# EAGLE board Uni-2.1,Complete (EAGLE 9.6.2)
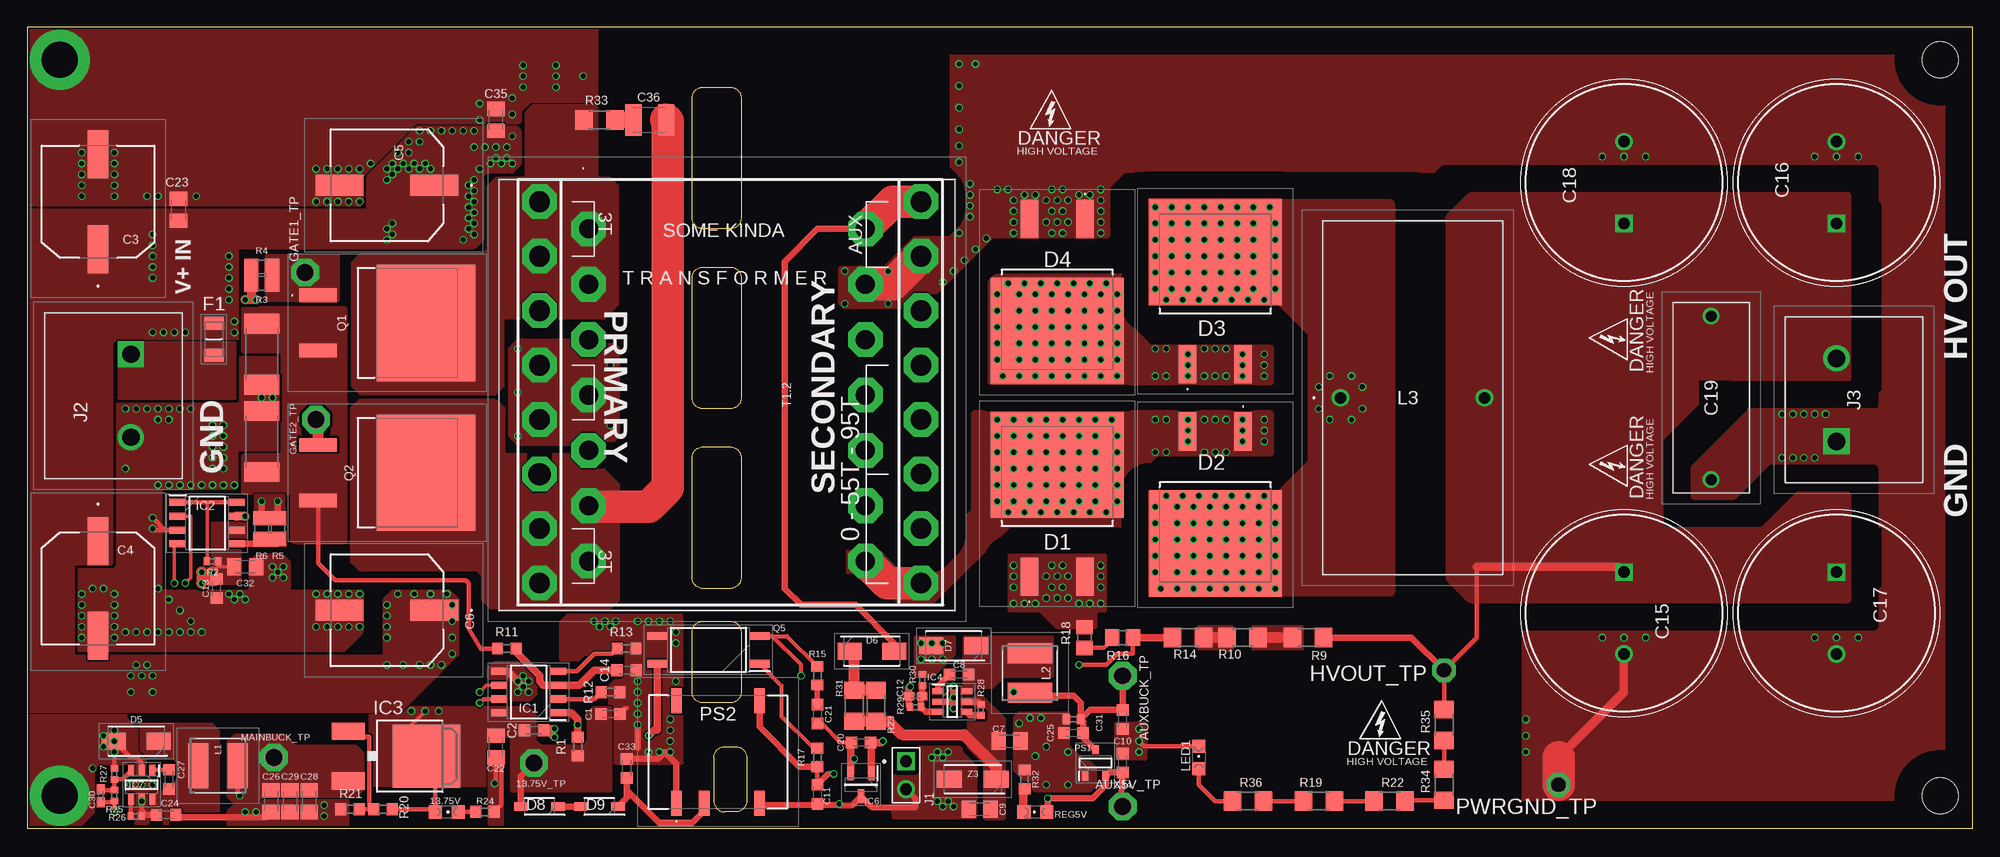
[diagram p0: board, top side]
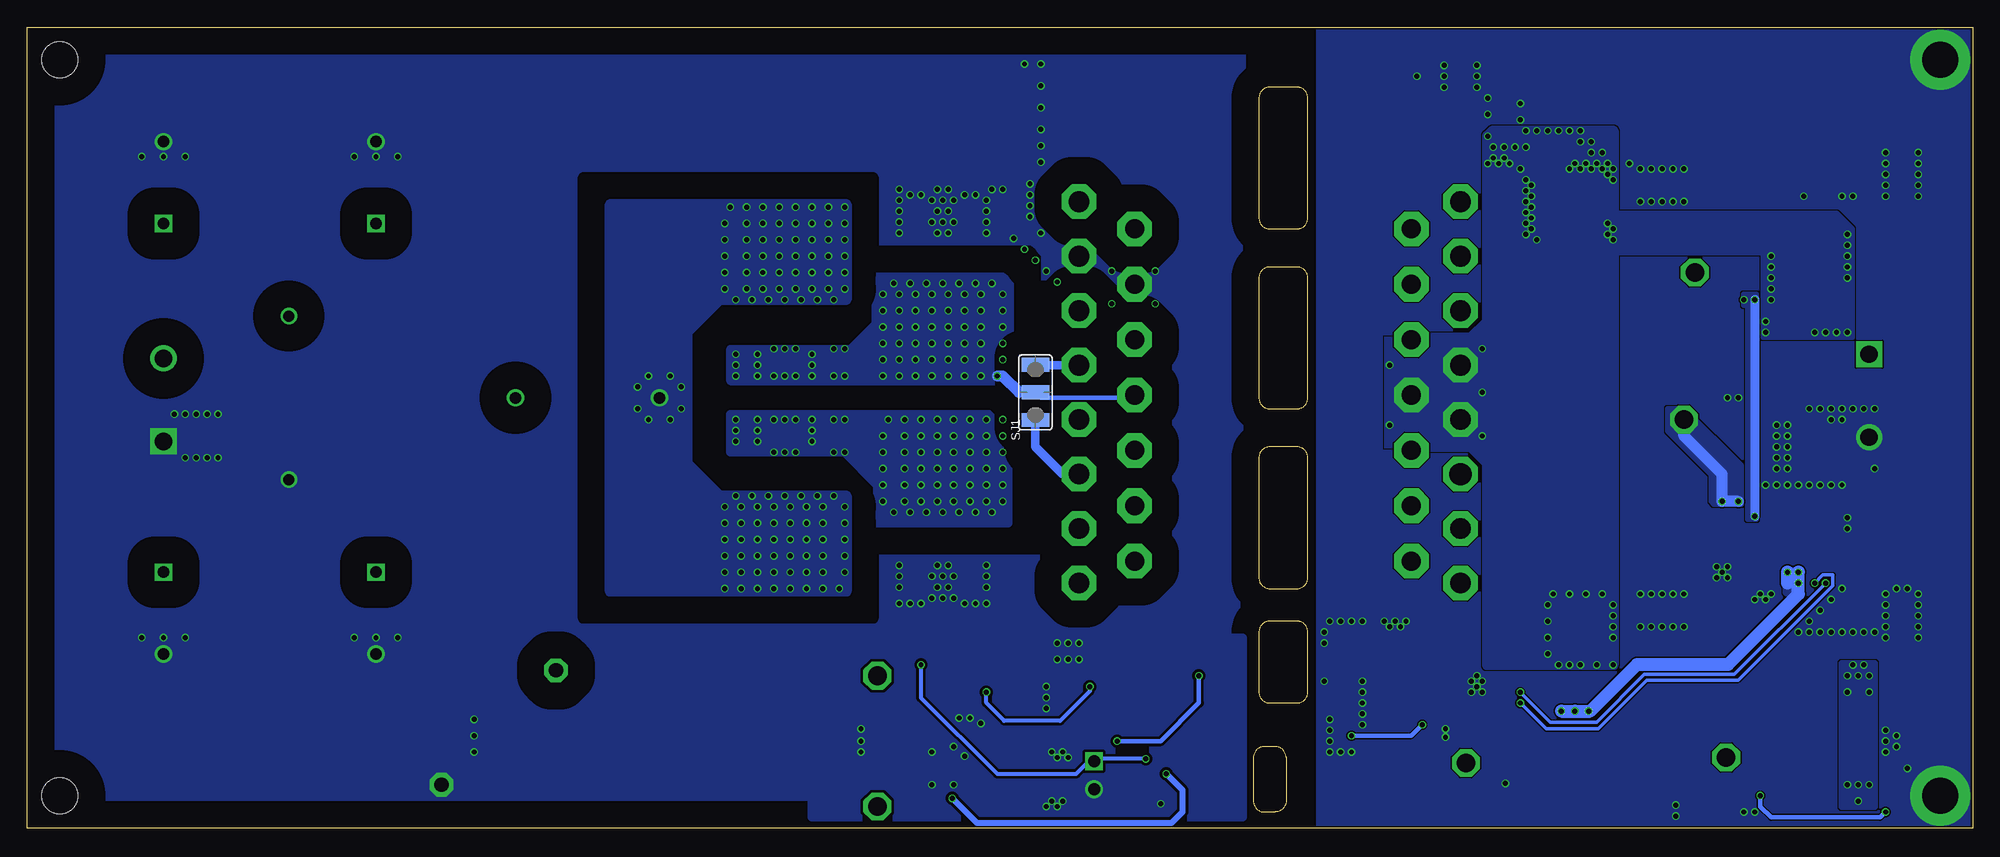
[diagram p1: board, bottom side, seen from below]

Size 178.5 x 73.5 mm. Coordinates in mm from the lower left corner, seen from the top.
Outline: 0,0 178.5,0 178.5,73.5 0,73.5 0,0
Outline: 64.5,11.5 62,11.5 arc-90 61,12.5 61,18 arc-90 62,19 64.5,19 arc-90 65.5,18 65.5,12.5 arc-90 64.5,11.5
Outline: 63,6.5 63,2.5 arc90 64,1.5 65,1.5 arc90 66,2.5 66,6.5 arc90 65,7.5 64,7.5 arc90 63,6.5
Outline: 64.5,22 62,22 arc-90 61,23 61,34 arc-90 62,35 64.5,35 arc-90 65.5,34 65.5,23 arc-90 64.5,22
Outline: 64.5,38.5 62,38.5 arc-90 61,39.5 61,50.5 arc-90 62,51.5 64.5,51.5 arc-90 65.5,50.5 65.5,39.5 arc-90 64.5,38.5
Outline: 64.5,55 62,55 arc-90 61,56 61,67 arc-90 62,68 64.5,68 arc-90 65.5,67 65.5,56 arc-90 64.5,55
Copper layers (1*16): Top 0.035559375mm / dielectric 1.6mm / Bottom 0.035559375mm
Design rules "jlcpcb2layer *": minimum track width 5mil, minimum drill 12mil, track to track 5mil, track to pad 5mil, pad to pad 5mil, via to via 5mil, smd to smd 5mil, copper to edge 8mil, drill to drill 6mil, minimum pad ring 5mil, minimum via ring 3mil, stop-mask expansion 2.5mil, vias tented up to drill 30mil, thermal gap 10mil
Holes 3.3 mm at 175.5,70.5 175.5,3

## Footprints (pad centres in the part's own frame; a part is rotated, then mirrored left to right if it is on the bottom)
CHIPLED_0805 = smd 1.2 x 1.2: A 0,-1.05; C 0,1.05
P1-17 = drill 1.702 pad 2.54 octagon: TP 0,0
C0603K = smd 1.05 x 1.08: 1 -0.875,0; 2 0.875,0
16SVF1000M = smd 1.9 x 4.4: 1 0,-4.35; 2 0,4.35
C0805K = smd 1.3 x 1.6: 1 -1,0; 2 1,0
C0402K = smd 0.925 x 0.74: 1 -0.6,0; 2 0.6,0
CAPPRD750W85D1800H2200 = drill 1.05 pad 1.575 square: 1 0,0 | drill 1.05 pad 1.575: 2 7.5,0
ECWFE2W105K = drill 1 pad 1.5: 1 0,0; 2 15,0
C0402 = smd 0.7 x 0.9: 1 -0.65,0; 2 0.65,0
C1210K = smd 1.5 x 2.9: 1 -1.5,0; 2 1.5,0
STB20N95K5 = smd 1.6 x 3.5: 1 -2.54,-6.907; 3 2.54,-6.907 | smd 12.2 x 9.75: 2 0,3.368
DIOM5127X229N = smd 2.2 x 1.55: 1 -2.05,0; 2 2.05,0
SOD3716X145N = smd 1.2 x 0.75: 1 -1.7,0; 2 1.7,0
1206SMTFUSE = smd 1.17 x 1.8: 1 -1.47,0; 2 1.47,0
P1-13 = drill 1.321 pad 2.159 octagon: TP 0,0
SOIC127P600X175-8N = smd 1.5 x 0.65: 1 -2.7,1.905; 2 -2.7,0.635; 3 -2.7,-0.635; 4 -2.7,-1.905; 5 2.7,-1.905; 6 2.7,-0.635; 7 2.7,0.635; 8 2.7,1.905
DPACK = smd 1.6 x 3: 1 -2.28,-4.8; 3 2.28,-4.8 | smd 5.8 x 6.2: 4 0,2.38
SOT95P280X100-6N = smd 1.05 x 0.55: 1 -1.3,0.95; 2 -1.3,0; 3 -1.3,-0.95; 4 1.3,-0.95; 5 1.3,0; 6 1.3,0.95
SOT95P237X112-3N = smd 1.3 x 0.6: 1 -1.05,0.95; 2 -1.05,-0.95; 3 1.05,0
61300211121 = drill 1.1 square: 1 -1.27,0 | drill 1.1: 2 1.27,0
TB00576202BE = drill 1.6 pad 2.4 square: 1 0,0 | drill 1.6 pad 2.4: 2 7.62,0
LQH5BPB100MT0L = smd 1.85 x 4.1: 1 -1.825,0; 2 1.825,0
2300LL102VRC = drill 1.06 pad 1.59: 1 0,0; 2 13.208,0
SOT95P240X120-3N = smd 0.85 x 0.6: 1 -1.2,0.95; 2 -1.2,-0.95; 3 1.2,0
NXE2S1205MCR13 = smd 1 x 2.3: 1 -3.81,-4.7; 3 -1.27,-4.7; 7 3.81,-4.7; 8 3.81,4.7; 14 -3.81,4.7
D2PAK = smd 1.257 x 3.429: 1 -2.54,-8.192; 3 2.54,-8.192 | smd 10.668 x 9.017: 2 0,1.715
SOP254P1015X230-4N = smd 1.85 x 0.7: 1 -4.7,1.27; 2 -4.7,-1.27; 3 4.7,-1.27; 4 4.7,1.27
R0603 = smd 1 x 1.1: 1 -0.85,0; 2 0.85,0
R0402 = smd 0.6 x 0.7: 1 -0.5,0; 2 0.5,0
R0805 = smd 1.3 x 1.5: 1 -0.95,0; 2 0.95,0
R2512 = smd 1.8 x 3.2: 1 -2.8,0; 2 2.8,0
R1206 = smd 1.6 x 1.803: 1 -1.422,0; 2 1.422,0
SJ_2W = smd 1.27 x 2.54: 1 -2.54,0; 2 0,0; 3 2.54,0
BIGTRANS! = drill 1.905 pad 3.175 octagon: 1 0,0; 2 0,5; 4 0,15; 5 0,20; 6 0,25; 7 0,30; 8 0,35; 9 35,0; 10 35,5; 11 35,10; 12 35,15; 13 35,20; 14 35,25; 15 35,30; 16 35,35 | drill 2.032 pad 3.175 octagon: 3 0,10
B66362B1014T001 = drill 1.75 pad 3.175 octagon: 1 0,0; 2 0,25.4; 3 5.08,0; 4 5.08,25.4; 5 10.16,0; 6 10.16,25.4; 7 15.24,0; 8 15.24,25.4; 9 20.32,0; 10 20.32,25.4; 11 25.4,0; 12 25.4,25.4; 13 30.48,0; 14 30.48,25.4
DIOM5226X220N = smd 2.3 x 1.55: 1 -2.15,0; 2 2.15,0

## Placement (x,y rotation side)
13.75V  GRN  [CHIPLED_0805]  38.5,1.5 270 top
13.75V_TP  TPSQPAD1-17  [P1-17]  46.5,6 90 top
AUX5V_TP  TPSQPAD1-17  [P1-17]  100.5,2 0 top
AUXBUCK_TP  TPSQPAD1-17  [P1-17]  100.5,14 270 top
C1  10 uF  [C0603K]  53.5,10.5 0 top
C2  0.1 uF  [C0603K]  46.5,9 0 top
C3  OVK151M1VTR-10131  [16SVF1000M]  6.5,57.5 0 top
C4  OVK151M1VTR-10131  [16SVF1000M]  6.5,22 180 top
C5  OVK151M1VTR-10131  [16SVF1000M]  33,59 90 top
C6  OVK151M1VTR-10131  [16SVF1000M]  33,20 90 top
C7  10 uF  [C0805K]  90.12,8 0 top
C8  0.1 uF  [C0603K]  85.5,14.12 0 top
C9  10 uF  [C0805K]  87.38,1.75 180 top
C10  10 uF  [C0603K]  100.5,10 90 top
C11  10 uF  [C0603K]  72.5,3.12 90 top
C12  100 pF  [C0402K]  81.5,12.12 0 top
C13  10 uF  [C0603K]  17.38,22 270 top
C14  470 pF  [C0603K]  55,14.5 0 top
C15  EEU-ED2V470S  [CAPPRD750W85D1800H2200]  146.5,23.5 270 top
C16  EEU-ED2V470S  [CAPPRD750W85D1800H2200]  166,55.5 90 top
C17  EEU-ED2V470S  [CAPPRD750W85D1800H2200]  166,23.5 270 top
C18  EEU-ED2V470S  [CAPPRD750W85D1800H2200]  146.5,55.5 90 top
C19  ECW-FE2W105K  [ECWFE2W105K]  154.5,32 90 top
C20  470pF  [C0603K]  76.5,7.88 0 top
C21  2.2nF  [C0603K]  72.5,10.5 90 top
C22  10 uF  [C0805K]  43,7.5 90 top
C23  10 uF  [C0805K]  13.88,56.75 270 top
C24  1 uF  [C0603K]  12.75,1.25 0 top
C25  10 uF  [C0603K]  96,8.75 0 top
C26  10 uF  [C0805K]  22.38,2.5 90 top
C27  0.1 uF  [C0603K]  13,4.5 90 top
C28  10 uF  [C0805K]  25.88,2.5 90 top
C29  10 uF  [C0805K]  24.12,2.5 90 top
C30  100 pF  [C0402K]  6.75,3 90 top
C31  10 uF  [C0402]  96,10 0 top
C32  10 uF  [C0805K]  20,24 180 top
C33  10 uF  [C0603K]  55,5.5 270 top
C34  10 uF  [C0603K]  100.5,6 270 top
C35  1 uF  [C0805K]  43,65 90 top
C36  [C1210K]  57.12,65 0 top
D1  FERD20H60CG-TR  [STB20N95K5]  94.5,30 0 top
D2  FERD20H60CG-TR  [STB20N95K5]  109,29.5 180 top
D3  FERD20H60CG-TR  [STB20N95K5]  109,49.5 0 top
D4  FERD20H60CG-TR  [STB20N95K5]  94.5,49 180 top
D5  SCHOTTKY  [DIOM5127X229N]  10,8 180 top
D6  US1M  [DIOM5127X229N]  77.5,16.25 0 top
D7  SCHOTTKY  [DIOM5127X229N]  85,16.75 180 top
D8  SM4007PL  [SOD3716X145N]  47,2 180 top
D9  SM4007PL  [SOD3716X145N]  52.5,2 180 top
F1  1206SMTFUSE  [1206SMTFUSE]  17.12,44.88 90 top
GATE1_TP  TPSQPAD1-17  [P1-17]  25.5,51 0 top
GATE2_TP  TPSQPAD1-17  [P1-17]  26.5,37.5 90 top
HVOUT_TP  TPSQPAD1-13  [P1-13]  130,14.5 270 top
IC1  UCC38083DR  [SOIC127P600X175-8N]  46,12.5 180 top
IC2  MCP14A0304T-E_SN  [SOIC127P600X175-8N]  16.5,28 0 top
IC3  LM317MBDT  [DPACK]  34.25,6.62 270 top
IC4  ME3116  [SOT95P280X100-6N]  84.88,11.62 0 top
IC6  TL431CL3T  [SOT95P237X112-3N]  76.5,4 270 top
IC7  ME3116  [SOT95P280X100-6N]  10.5,4 270 top
J1  61300211121  [61300211121]  80.62,4.88 270 top
J2  TB005-762-02BE  [TB00576202BE]  9.5,43.5 270 top
J3  TB005-762-02BE  [TB00576202BE]  166,35.5 90 top
L1  LQH5BPN6R8NT0L  [LQH5BPB100MT0L]  17.5,5.75 0 top
L2  LQH5BPN6R8NT0L  [LQH5BPB100MT0L]  92,14.25 90 top
L3  2300LL-102-V-RC  [2300LL102VRC]  120.5,39.5 0 top
LED1  RED  [CHIPLED_0805]  107.5,6.5 0 top
MAINBUCK_TP  TPSQPAD1-17  [P1-17]  22.62,6.5 180 top
PS1  AP2120N-5.0TRG1  [SOT95P240X120-3N]  98,6 90 top
PS2  NXE2S1205MC-R13  [NXE2S1205MCR13]  63.38,7 0 top
PWRGND_TP  TPSQPAD1-13  [P1-13]  140.5,4 180 top
Q1  STB130N6F7  [D2PAK]  34.88,46.38 270 top
Q2  STB130N6F7  [D2PAK]  34.88,32.62 270 top
Q5  VOL617A-4X001T  [SOP254P1015X230-4N]  62.5,16.38 180 top
R1  1k  [R0603]  50.5,7.5 90 top
R2  1k  [R0402]  17,24.5 0 top
R3  10  [R0805]  21.5,50 0 top
R4  10  [R0805]  21.5,51.5 0 top
R5  10  [R0805]  23,27.5 90 top
R6  10  [R0805]  21.5,27.5 90 top
R7  0.05  [R2512]  21.5,35.5 270 top
R8  0.05  [R2512]  21.5,43.5 90 top
R9  100k  [R1206]  117.5,17.5 180 top
R10  100k  [R1206]  111.5,17.5 180 top
R11  1k  [R0603]  44,16.5 180 top
R12  22k  [R0603]  53.5,12.5 0 top
R13  470k  [R0603]  55,16.5 0 top
R14  100k  [R1206]  106.5,17.5 180 top
R15  15k  [R0603]  72.5,14 270 top
R16  2.2k  [R0805]  100.5,17.5 0 top
R17  820  [R0603]  72.5,6.5 90 top
R18  330  [R0805]  97,17.5 270 top
R19  20k  [R1206]  118.5,2.5 0 top
R20  470  [R0603]  32.62,1.75 0 top
R21  4.7k  [R0603]  29.62,1.75 0 top
R22  20k  [R1206]  125,2.5 0 top
R23  100  [R1206]  77.88,11.25 270 top
R24  2k  [R0603]  42,1.5 180 top
R25  10k  [R0402]  8,3 270 top
R26  100k  [R0402]  10,1.12 180 top
R27  560  [R0402]  8,5 90 top
R28  100k  [R0402]  87.5,10.88 270 top
R29  10k  [R0402]  81.5,11.12 0 top
R30  10k  [R0402]  82.12,13.62 90 top
R31  100  [R1206]  75.88,11.25 270 top
R32  1k  [R0603]  91.5,4.5 270 top
R33  [R1206]  52.5,65 0 top
R34  20k  [R1206]  130,4 90 top
R35  20k  [R1206]  130,9.5 90 top
R36  20k  [R1206]  112,2.5 0 top
REG5V  RED  [CHIPLED_0805]  92.5,1.5 90 top
SJ1  [SJ_2W]  86,40 90 bottom
T1  BIGTRANS  [BIGTRANS!]  47,22.5 0 top
T1.2  B66362B1014T001  [B66362B1014T001]  51.5,55 270 top
U$1  HV  [PSFBC_ELECTRIC_SHOCK]  145,45.16 90 top
U$2  HV  [PSFBC_ELECTRIC_SHOCK]  145,33.55 90 top
U$3  HV  [PSFBC_ELECTRIC_SHOCK]  124.43,10 0 top
U$4  HV  [PSFBC_ELECTRIC_SHOCK]  94.16,66 0 top
Z3  1SMA4753A  [DIOM5226X220N]  86.75,4.5 180 top

## Library data of the parts
13.75V REG5V = led; LCSC_PART: C72043
13.75V_TP AUX5V_TP AUXBUCK_TP GATE1_TP GATE2_TP HVOUT_TP MAINBUCK_TP PWRGND_TP = testpad
C1 C2 C10 C13 C24 C25 C31 C33-C35 = rcl; LCSC_PART: C440198; SPICEPREFIX: C
C3-C6 Q1 Q2 T1 = SamacSys_Parts
C7 C9 C11 C20 C21 C36 = rcl; SPICEPREFIX: C
C8 C27 = rcl; LCSC_PART: C14663; SPICEPREFIX: C
C12 C30 = rcl; LCSC_PART: C1546; SPICEPREFIX: C
C14 = rcl; LCSC_PART: C1620; SPICEPREFIX: C
C15-C18 = SamacSys_Parts; DESCRIPTION: Aluminium Electrolytic Capacitor, Radial Lead; HEIGHT: 22mm; MANUFACTURER_NAME: Panasonic; MANUFACTURER_PART_NUMBER: EEU-ED2V470S; MOUSER_PART_NUMBER: 667-EEU-ED2V470S; MOUSER_PRICE-STOCK: https://www.mouser.co.uk/ProductDetail/Panasonic/EEU-ED2V470S?qs=MtOUKumLmnbbtLZIfgoN%2Fg%3D%3D
C19 = SamacSys_Parts; DESCRIPTION: Film Capacitors 450VDC 1.0uF 10% MPP L/S=15mm; HEIGHT: 13mm; MANUFACTURER_NAME: Panasonic; MANUFACTURER_PART_NUMBER: ECW-FE2W105K
C22 C23 C26 C28 C29 C32 = rcl; LCSC_PART: C440198
D1-D4 = SamacSys_Parts; DESCRIPTION: Rectifiers Field-Effect Rectifier Diode 60V; HEIGHT: 4mm; MANUFACTURER_NAME: STMicroelectronics; MANUFACTURER_PART_NUMBER: FERD20H60CG-TR; MOUSER_PART_NUMBER: 511-FERD20H60CG-TR; MOUSER_PRICE-STOCK: https://www.mouser.co.uk/ProductDetail/STMicroelectronics/FERD20H60CG-TR?qs=1mbolxNpo8ebHpKodyoUCQ%3D%3D
D5 D7 = SamacSys_Parts; DESCRIPTION: Schottky Diodes & Rectifiers 60V Sctky Bar Rectfr SMA (DO-214AC); HEIGHT: 2.29mm; LCSC_PART: C22452; MANUFACTURER_NAME: Vishay; MANUFACTURER_PART_NUMBER: SS16HE3_B/H; MOUSER_PART_NUMBER: 78-SS16HE3_B/H; MOUSER_PRICE-STOCK: https://www.mouser.co.uk/ProductDetail/Vishay-General-Semiconductor/SS16HE3_B-H?qs=MLItCLRbWsyJmaJ87KUvIw%3D%3D
D6 = SamacSys_Parts; DESCRIPTION: Schottky Diodes & Rectifiers 60V Sctky Bar Rectfr SMA (DO-214AC); HEIGHT: 2.29mm; MANUFACTURER_NAME: Vishay; MANUFACTURER_PART_NUMBER: SS16HE3_B/H; MOUSER_PART_NUMBER: 78-SS16HE3_B/H; MOUSER_PRICE-STOCK: https://www.mouser.co.uk/ProductDetail/Vishay-General-Semiconductor/SS16HE3_B-H?qs=MLItCLRbWsyJmaJ87KUvIw%3D%3D
D8 D9 = SamacSys_Parts; DESCRIPTION: Diode Switching 150mA 100V 400mW SOD123 Diodes Inc 1N4148W-7-F Switching Diode 100V, 2-Pin SOD-123; HEIGHT: 1.45mm; LCSC_PART: C64898; MANUFACTURER_NAME: Diodes Inc.; MANUFACTURER_PART_NUMBER: 1N4148W-7-F; MOUSER_PART_NUMBER: 621-1N4148W-F; MOUSER_PRICE-STOCK: https://www.mouser.co.uk/ProductDetail/Diodes-Incorporated/1N4148W-7-F?qs=LHX0FizJzg7Ae9ZM8LTAWw%3D%3D
F1 = SamacSys_Parts; DESCRIPTION: Surface Mount Fuses Surface Mt Chip fuse 1206 size, 40A; HEIGHT: 0.83mm; LCSC_PART: C136359; MANUFACTURER_NAME: Stewart Connector; MANUFACTURER_PART_NUMBER: 0685P9400-01; MOUSER_PART_NUMBER: 530-0685P9400-01; MOUSER_PRICE-STOCK: https://www.mouser.co.uk/ProductDetail/Bel-Fuse/0685P9400-01?qs=vLWxofP3U2w%252BWbEEn77VXg%3D%3D
IC1 = SamacSys_Parts; DESCRIPTION: Current Mode Push-Pull PWM With Programmable Slope Compensation; HEIGHT: 1.75mm; MANUFACTURER_NAME: Texas Instruments; MANUFACTURER_PART_NUMBER: UCC38083DR; MOUSER_PART_NUMBER: 595-UCC38083DR; MOUSER_PRICE-STOCK: https://www.mouser.co.uk/ProductDetail/Texas-Instruments/UCC38083DR/?qs=zqbRmZ%252BfZD9Rvt3ie7yhvg%3D%3D
IC2 = SamacSys_Parts; DESCRIPTION: Microchip Technology MCP14A0304T-E/SN Dual Low Side MOSFET Power Driver, 3A 8-Pin, SOIC; HEIGHT: 1.75mm; MANUFACTURER_NAME: Microchip; MANUFACTURER_PART_NUMBER: MCP14A0304T-E/SN; MOUSER_PART_NUMBER: 579-MCP14A0304T-E/SN; MOUSER_PRICE-STOCK: https://www.mouser.co.uk/ProductDetail/Microchip-Technology/MCP14A0304T-E-SN?qs=w%2Fv1CP2dgqqqWUCaoFqV0w%3D%3D
IC3 = v-reg
IC4 IC7 = SamacSys_Parts; LCSC_PART: C97643
IC6 = SamacSys_Parts; DESCRIPTION: Adjustable micropower shunt voltage reference; HEIGHT: 1.12mm; MANUFACTURER_NAME: STMicroelectronics; MANUFACTURER_PART_NUMBER: TL431CL3T; MOUSER_PART_NUMBER: 511-TL431CL3T; MOUSER_PRICE-STOCK: https://www.mouser.co.uk/ProductDetail/STMicroelectronics/TL431CL3T?qs=L6eUzyzWLAsU2SYO1NdhdA%3D%3D
J1 = Headers; CREATED_BY: PCBLayout.com; DIGI_KEY_PART_NUMBER: 732-5315-ND; MANUFACTURER: Wurth Electronics Inc.; MPN: 61300211121
J2 J3 = SamacSys_Parts; DESCRIPTION: Fixed Terminal Blocks screw type, 7.62 , horizontal, 2 poles, CUI Blue, slotted screw, PCB mount; HEIGHT: 21.7mm; MANUFACTURER_NAME: CUI Inc.; MANUFACTURER_PART_NUMBER: TB005-762-02BE; MOUSER_PART_NUMBER: 490-TB005-762-02BE; MOUSER_PRICE-STOCK: https://www.mouser.co.uk/ProductDetail/CUI-Devices/TB005-762-02BE?qs=vLWxofP3U2zXv1H2wuShow%3D%3D
L1 L2 = SamacSys_Parts; DESCRIPTION: MURATA - LQH5BPN6R8NT0L - INDUCTOR, 6.8UH, +/-30%, POWER; HEIGHT: 2.2mm; MANUFACTURER_NAME: Murata Electronics; MANUFACTURER_PART_NUMBER: LQH5BPN6R8NT0L; MOUSER_PART_NUMBER: 81-LQH5BPN6R8NT0L0L; MOUSER_PRICE-STOCK: https://www.mouser.co.uk/ProductDetail/Murata-Electronics/LQH5BPN6R8NT0L?qs=3ZwS9AhGA%2F4N8axqd87eRQ%3D%3D
L3 = SamacSys_Parts; DESCRIPTION: Inductor High Current Toroid 1000uH/378.9uH 15% 1KHz 3.5A 137mOhm DCR RDL; HEIGHT: 32.512mm; MANUFACTURER_NAME: Bourns; MANUFACTURER_PART_NUMBER: 2300LL-102-V-RC; MOUSER_PART_NUMBER: 652-2300LL-102-V-RC; MOUSER_PRICE-STOCK: https://www.mouser.co.uk/ProductDetail/Bourns/2300LL-102-V-RC?qs=d7g9p1yFhWZHzfawXthNnQ%3D%3D
LED1 = led
PS1 = SamacSys_Parts; DESCRIPTION: IC REG LINEAR 5V 150MA SOT23; HEIGHT: 1.2mm; MANUFACTURER_NAME: Diodes Inc.; MANUFACTURER_PART_NUMBER: AP2120N-5.0TRG1; MOUSER_PART_NUMBER: 621-AP2120N-5.0TRG1; MOUSER_PRICE-STOCK: https://www.mouser.co.uk/ProductDetail/Diodes-Incorporated/AP2120N-50TRG1?qs=M%2FOdCRO8QQ3JQu49DdtyIA%3D%3D
PS2 = SamacSys_Parts; DESCRIPTION: Isolated DC/DC Converters DC/DC SM 2W 12-5V Single 3kV; HEIGHT: 4.81mm; MANUFACTURER_NAME: Murata Electronics; MANUFACTURER_PART_NUMBER: NXE2S1205MC-R13; MOUSER_PART_NUMBER: 580-NXE2S1205MC-R13; MOUSER_PRICE-STOCK: https://www.mouser.co.uk/ProductDetail/Murata-Power-Solutions/NXE2S1205MC-R13?qs=UqPySVGgRwFuSegQbHt7Hw%3D%3D
Q5 = SamacSys_Parts; DESCRIPTION: Vishay VOL617A-4X001T DC Input Phototransistor Output Optocoupler, Surface Mount, 4-Pin LSOP; HEIGHT: 2.3mm; MANUFACTURER_NAME: Vishay; MANUFACTURER_PART_NUMBER: VOL617A-4X001T; MOUSER_PART_NUMBER: 78-VOL617A-4X001T; MOUSER_PRICE-STOCK: https://www.mouser.co.uk/ProductDetail/Vishay-Semiconductors/VOL617A-4X001T?qs=s4XK1XdnRilEoTFGQUoymA%3D%3D
R1 R20 R21 R24 R32 = rcl; LCSC_PART: C22975; SPICEPREFIX: R
R2-R10 R14-R19 R22 R23 R31 R33-R36 = rcl; SPICEPREFIX: R
R11 = rcl; LCSC_PART: C21190; SPICEPREFIX: R
R12 = rcl; LCSC_PART: C31850; SPICEPREFIX: R
R13 = rcl; LCSC_PART: C25811; SPICEPREFIX: R
R25 R29 R30 = rcl; LCSC_PART: C25779; SPICEPREFIX: R
R26 R28 = rcl; LCSC_PART: C25741; SPICEPREFIX: R
R27 = rcl; LCSC_PART: C4177; SPICEPREFIX: R
SJ1 = jumper
T1.2 = SamacSys_Parts; DESCRIPTION: Ferrite Accessories, E Cores Accessories(EFD/ER/ETD), Coil former (ETD 34/17/11); HEIGHT: 33.1mm; MANUFACTURER_NAME: TDK; MANUFACTURER_PART_NUMBER: B66362B1014T001; MOUSER_PART_NUMBER: 871-B66362B1014T001; MOUSER_PRICE-STOCK: https://www.mouser.co.uk/ProductDetail/EPCOS-TDK/B66362B1014T001?qs=w5o0Loj0u7M9FVK%2Ff7P38g%3D%3D
U$1-U$4 = RMP - HALF BRIDGE 0.0.1
Z3 = SamacSys_Parts; DESCRIPTION: ON Semiconductor 1SMA5942BT3G Zener Diode, 51V 5% 1.5 W SMT 2-Pin SMA; HEIGHT: 2.2mm; LCSC_PART: C362284; MANUFACTURER_NAME: onsemi; MANUFACTURER_PART_NUMBER: 1SMA5942BT3G; MOUSER_PART_NUMBER: 863-1SMA5942BT3G; MOUSER_PRICE-STOCK: https://www.mouser.co.uk/ProductDetail/ON-Semiconductor/1SMA5942BT3G?qs=y2kkmE52mdPrQGqg%252Bfz9yg%3D%3D

## Nets
28VFUSE: C3.1 C4.1 C5.1 C6.1 C23.2 C24.1 C35.1 F1.2 IC7.5 R26.1 T1.2.7 T1.4 T1.5
AUX1: D6.2 T1.2.2 T1.16
AUXB: AUXBUCK_TP.TP C10.2 C12.1 C25.2 C31.2 L2.1 PS1.3 R29.1
AUXD: C7.1 C9.1 IC4.5 R23.2 R28.1 R31.2 Z3.1
BRIDGEGND: Q1.3 Q2.3 R7.2 R8.2 R11.2
BS1: C27.2 IC7.1
BS2: C8.1 IC4.1
CS-IN: C14.1 IC1.3 R11.1
DC+: C15.1 C16.1 C17.1 C18.1 C19.2 HVOUT_TP.TP J3.2 L3.2 R9.1 R35.2
DRAIN1: Q1.2 R33.1 T1.2.1 T1.2.3 T1.7 T1.8
DRAIN2: C36.2 Q2.2 T1.1 T1.2 T1.2.11 T1.2.13
EN1: IC7.4 R26.2
EN2: IC4.4 R28.2
FB1: C30.2 IC7.3 R25.1 R27.1
FB2: C12.2 IC4.3 R29.2 R30.1
GNDA: C1.2 C2.2 C3.2 C4.2 C5.2 C6.2 C13.2 C14.2 C22.1 C23.1 C24.2 C26.1 C28.1 C29.1 C32.1 C33.1 C35.2 D5.2 IC1.5 IC2.3 IC7.2 J2.2 PS2.1 Q5.3 R7.1 R8.1 R12.2 R13.2 R21.1 R24.1 R27.2
N$1: R9.2 R10.1
N$2: IC1.7 IC2.2
N$3: C20.1 C21.1 IC6.2 J1.1 R14.2 R16.2
N$4: D8.1 D9.2
N$5: IC1.6 IC2.4
N$6: IC2.1 IC2.8 R2.1
N$7: IC2.7 R3.1 R4.1
N$8: IC2.5 R5.1 R6.1
N$9: SJ1.1 T1.11
N$10: IC3.1 R20.1 R21.2
N$11: C33.2 D9.1 PS2.3
N$12: LED1.A R36.1
N$13: IC1.2 R12.1
N$14: R19.1 R36.2
N$15: R10.2 R14.1
N$16: R16.1 R18.2
N$17: R19.2 R22.1
N$18: C20.2 IC6.1 Q5.2 R15.1
N$19: Q5.1 R17.2
N$20: F1.1 J2.1
N$21: C21.2 R15.2
N$22: 13.75V.C R24.2
N$24: R22.2 R34.1
N$25: SJ1.3 T1.13
N$26: R32.2 REG5V.C
N$27: D6.1 R23.1 R31.1
N$28: R34.2 R35.1
N$29: C36.1 R33.2
OPTO-EMITT: IC1.1 Q5.4 R1.2
PRE: C26.2 C28.2 C29.2 C30.1 IC3.3 L1.2 MAINBUCK_TP.TP R25.2
PWRGND: C7.2 C9.2 C10.1 C11.1 C15.2 C16.2 C17.2 C18.2 C19.1 C25.1 C31.1 C34.1 D1.1 D1.3 D4.1 D4.3 D7.2 IC4.2 IC6.3 J1.2 J3.1 LED1.C PS1.1 PS2.7 PWRGND_TP.TP R18.1 R30.2 R32.1 T1.2.4 T1.15 Z3.2
Q1G: GATE1_TP.TP Q1.1 R3.2 R4.2
Q2G: GATE2_TP.TP Q2.1 R5.2 R6.2
RECT: D2.2 D3.2 L3.1
REG: 13.75V.A 13.75V_TP.TP C1.1 C2.1 C13.1 C22.2 C32.2 D8.2 IC1.8 IC2.6 IC3.4 R1.1 R2.2 R20.2
REG5V: AUX5V_TP.TP C11.2 C34.2 PS1.2 PS2.8 R17.1 REG5V.A
RT: IC1.4 R13.1
SWITCH1: C27.1 D5.1 IC7.6 L1.1
SWITCH2: C8.2 D7.1 IC4.6 L2.2
TRANS1: D3.1 D3.3 D4.2 SJ1.2 T1.2.8
TRANS2: D1.2 D2.1 D2.3 T1.2.14 T1.9

## Tracks (layer width: path | path; a pad name or v marks a point on that pad's centre or on a via)
28VFUSE  (via drill 0.45)
  Top 0.406: IC7.5 10.5,1.5 R26.1
  Top 0.6: C24.1 10.75,1.25 10.5,1.5
  other vias: 33.5,61 34.5,61 35.5,61 36.5,61 41,62.5 35,63 42.5,61 43.5,61 34,60.5 35,60.5 36,60.5 37,60.5 36,64 37,64 38,64 39,64 41,57.5 41,58.5 43,61.5 44,61.5 36,63 44.5,63.5 40,64 41,54.5 44.5,61 41,56.5 41,55.5 41,59.5 41.5,60.5 34,62 35,62 33,59.5 33.5,60 33,60.5 10.5,4 9.5,4 11.5,4 9.5,12.5 11.5,14 11.5,12.5 9.5,14 10,15 44,62.5 43,62.5 42,62.5 39,16 38,15 39,17.5 39,19 39,20.5 33,15 33,20.5 33,19.5 33,18.5 33,17.5 37,15 36,15 34.5,15 34,21.5 35.5,21.5 37,21.5 38.5,21.5 41,64 33,54 33,55 40,54 40.5,55 40.5,57 40.5,59 40.5,58 40.5,56 33.5,54.5 33.5,55.5 19,45.5 19,46.5 14.5,45.5 13.5,45.5 12.5,45.5 11.5,45.5 18.5,48.5 18.5,49.5 18.5,50.5 18.5,51.5 18.5,52.5 45,40 53.5,42.5 53.5,37 45,44 45,36 11,15 10.5,14 10.5,2.5 11.5,54.5 11.5,53.5 11.5,52.5 11.5,51.5 11.5,50.5
  pour Top (rank 3, no thermals): 19,45 7.5,45 7.5,24.5 -3.5,24.5 -3.5,40 -4,40 -4,56.5 31.5,56.5 31.5,59.5 41.5,59.5 41.5,54.13 40.87,53.5 19,53.5
  pour Top (rank 6, no thermals): 42,60.5 44.37,60.5 45,61.13 45,63.87 44.37,64.5 36,64.5 31.5,60 31.5,59.5 41,59.5
  pour Top (rank 3, no thermals): 54,36.13 54,43.87 53.37,44.5 45.13,44.5 44.5,43.87 44.5,36.13 45.13,35.5 53.37,35.5
  pour Bottom (no thermals): 53.5,45 46,45 44.5,46.5 44.5,63.5 44,64 33,64 33,15 44.5,15 44.5,33.5 46,35 53.5,35
  pour Top (rank 2, no thermals): -2,11 34.12,11 39.25,16.13 39.25,20.86 38.62,21.5 33.63,21.5 33,20.86 33,15.5 4,15.5 4,27 -2,27
  pour Top (no thermals): 11.75,4.38 9.38,4.38 9.38,3.12 10,2.5 10,0.5 11,0.5 11,3 11.75,3.75
  pour Bottom (no thermals): 12,15.12 9,15.12 9,2 12,2
  pour Bottom (no thermals): 35.12,56.5 12.5,56.5 11,55 11,45 19.25,45 19.25,52.75 35.12,52.75
AUX1
  Top 0.6: D6.2 79.55,16.95 76,20.5 71,20.5 69.5,22 69.5,52 72.5,55 T1.2.2
  Top 3: T1.2.2 79.4,57.5 T1.16
AUXB  (via drill 0.45)
  Top 0.4: 96.88,8.32 C25.2 | 96.88,9.78 C31.2
  Top 0.55: L2.1 93.08,12.43 93.35,12.15
  Top 0.6: C12.1 80.9,11.22 R29.1 | 93.35,12.15 96,12.15 96.65,11.5 C31.2 97.53,10.88 C10.2 AUXBUCK_TP.TP | PS1.3 96.88,8.32 | C25.2 96.88,9.78
  Top 0.7: C12.1 80.9,12.9 v81,13 | L2.1 90.58,12.43 v90.5,12.5
  Bottom 0.35: v81,13 81,12.6 83.73,9.86 88.86,9.86 90.5,11.5 v90.5,12.5
AUXD
  Top 0.6: R28.1 87.25,11.62 IC4.5
  Top 1: R31.2 R23.2 79.01,9.83 80.24,8.6 85.94,8.6 88.9,5.64 Z3.1
  pour Top (isolate 0.254, rank 3, no thermals): 88,6 88,1 89.5,1 89.5,10 87.5,12 86,12 86,10 86.5,9.5 86.5,7.5
BRIDGEGND
  Top 0.406: R11.2 41.6,16.5 40.5,18.33 40.5,22.5 40.25,22.75 28.25,22.75 26.68,24.32 Q2.3
  pour Top (rank 6, no thermals): 29,34 20,34 20,31 24.5,31 24.5,26.5 29,26.5
  pour Top (isolate 0.254, rank 3, no thermals): 29,47.5 20,47.5 20,44 23.62,44 23.62,33 29,33
BS1
  Top 0.406: IC7.1 11.53,5.38 C27.2
BS2
  Top 0.6: IC4.1 83.58,13.07 C8.1
CS-IN
  Top 0.7: R11.1 44.85,16.15 47,14 47,13.5 47.37,13.13 IC1.3 50.63,13.13 52,14.5 C14.1
DC+
  Top 0.406: 133,24 133,17.5 HVOUT_TP.TP R35.2
  Top 0.6: 130.58,15.08 HVOUT_TP.TP 127,17.5 R9.1
  Top 0.8: 133,24 146,24 C15.1
  pour Top (isolate 2.5, rank 2, no thermals): 167,58 132.5,58 130.5,56 130.5,23 132.5,21 167,21 167,30.5 153,30.5 153,41.5 167,41.5
  pour Top (isolate 2.5, rank 2, no thermals): 156.5,41 167.12,41 167.12,44 156.5,44
DRAIN1
  pour Top (rank 6, no thermals): 53.37,59.5 43.13,59.5 42.5,58.87 42.5,53.13 41.87,52.5 30.64,52.5 30,51.87 30,40.63 30.64,40 42.87,40 43.5,40.63 43.5,46.87 43.63,47 52.87,47 54,48.13 54,58.87
  pour Top (rank 3, no thermals): 52,66 46.5,66 46,65.5 46,56 52,56
DRAIN2
  Top 1.016: 51.6,29.5 T1.2.11
  Top 3: C36.2 58.75,64.88 58.75,31.25 57,29.5 51.6,29.5
  pour Top (rank 3, no thermals): 42.87,39 30.64,39 30,38.37 30,24.64 30.64,24 41.37,24 42,23.36 42,21.14 42.63,20.5 53.37,20.5 54,21.14 54,31.36 51.37,34 43.5,34 43.5,38.37
EN1
  Top 0.406: R26.2 9.5,2.65 IC7.4
EN2
  Top 0.6: IC4.4 86.47,10.38 R28.2
FB1
  Top 0.406: C30.2 6.85,3.5 R25.1 R27.1 8.75,4.5 IC7.3
FB2
  Top 0.6: IC4.3 82.45,10.68 R29.2 82,12.03 C12.2 82.12,12.15 R30.1
GNDA  (via drill 0.45, 3.3 pad 5.5)
  Top 0.4: IC7.2 10.5,6 10,6.5 9.45,6.5 D5.2 | R27.2 v8,7
  Top 0.406: v11.5,27.5 11.63,27.36 IC2.3 12.63,27.36 v11.5,28.5 | R24.1 43.5,2.15 43.5,6 C22.1 43,4.25 v42.88,4.12 | 47.5,9.12 C2.2 47.75,9 | 55,11 54.88,11 C1.2
  Top 0.6: C24.2 13.87,1 21.88,1 C26.1 | 56,7.38 v56,9.5 | PS2.1 59.56,5.94 58.5,7 57.88,6.38 C33.1
  Top 0.7: IC1.5 44.09,14.4 v45,13.5 v45.5,13 | 47.5,9.12 v48.38,9.12 | 47.75,9 v48.38,8.38
  other vias: 11,38.5 12,38.5 14,38.5 15,38.5 12,37.5 10,38.5 9,33 13,38.5 9,38.5 13,37.5 18,37 18,36 18,35 18,34 18,33 17,37 17,36 17,35 17,34 17,33 5,20.5 5,17.5 5,18.5 8,20.5 8,18.5 8,17.5 6,22 8,21.5 21,1.5 20,1.5 27.25,1.12 27.25,2.12 30.5,18.5 29.5,18.5 28.5,18.5 27.5,18.5 26.5,18.5 26.5,21.5 27.5,21.5 28.5,21.5 29.5,21.5 30.5,21.5 56,11.5 56,10.5 59.5,17 59,19 58,19 57,19 56,19 53.5,18.5 52.5,18.5 53,19 52,19 54,19 30.5,60.5 29.5,60.5 28.5,60.5 27.5,60.5 26.5,60.5 26.5,57.5 27.5,57.5 28.5,57.5 29.5,57.5 30.5,57.5 45.5,68 45.5,69 45.5,70 48.5,70 48.5,69 48.5,68 5,58 5,59 5,60 5,62 8,62 8,61 8,60 8,59 8,58 5,61 8,19.5 7,22 5,19.5 5,21.5 3,3 3,70.5 6,5.5 23.5,24 22.5,24 23,23.5 22.5,23 23.5,23 18.5,21.5 19.5,21.5 19,21 20,21 13,21 12,22 16,18 14,20 15,19 12,31.5 13,31.5 18,31.5 14,31.5 15,31.5 16,31.5 17,31.5 19,31.5 15,18 14,18 13,18 12,18 11,18 10,18 9,18 22.5,39.5 21.5,39.5 12,58 11,58 15.5,58 51,69 41.5,65 44.5,65.5 41.5,66.5 44.5,67 31.5,61 59.5,18 59.5,13.5 59,8 59,10 59,9 56,12.5 56,13.5 59,7 58,7 57,7 46,13.5 45,12.5 46,12.5 45.5,14 8,8 8,9 7,8.5 7,7.5
  pour Bottom (rank 6, no thermals): 60.12,80 60.12,-3 -20,-3 -20,80
  pour Top (isolate 0.254, rank 6, no thermals): 19.5,39 8.5,39 8.5,25 5,25 5,15.5 27.86,15.5 30.5,18.13 30.5,21.5 12,21.5 12,31.5 19,31.5 19,35 22.75,35 22.75,43 19.5,43
  pour Top (rank 6, no thermals): 30.5,73.5 -3.5,73.5 -3.5,57.5 30.5,57.5
  pour Top (rank 6, no thermals): 23.36,25 21.14,25 20.5,24.36 20.5,21.14 24,21.14 24,24.36
  pour Top (rank 3, no thermals): 28.5,58 35.5,65 45,65 45,66 46,67 52,67 52,73.5 28.5,73.5
  pour Top (rank 6, no thermals): 59.87,9.5 59.87,19.5 49.63,19.5 49,18.87 49,15.5 50.5,15.5 51,16 53,16 54,17 55,17 55,14 54.5,13.5 54,13.5 53.5,13 53.5,11.5 54,11 54,10 54.5,9.5
  pour Top (rank 6, no thermals): 9,11 -3.5,11 -3.5,4 0.5,0 4.5,0 6,1.5 6,5.5 7,6.5 8,6.5 9,7.5
  pour Top (no thermals): 7,6 9.5,6 10,5.5 10,5 10.75,5 10.75,6.25 10,7 10,9 9,10 7.5,10 6.5,9 6.5,6.5
  pour Top (rank 6, no thermals): 28,3 27.5,2.5 21.5,2.5 21,2 19,2 18.5,1.5 18.5,0 29.38,0 29.38,3
  pour Top (rank 6, no thermals): 59.99,6 59.99,19.5 49.63,19.5 49,18.87 49,15.5 50.5,15.5 51,16 53,16 54,17 55,17 55,14 54.5,13.5 54,13.5 53.5,13 53.5,11.5 54,11 54,6
  pour Top (no thermals): 46,15 43,15 42.5,14.5 42.5,14 44,14 44.5,13.5 44.5,12 46,12 46.5,12.5 46.5,13.5 46.5,14.5
  pour Top (no thermals): 43.5,6.5 42.5,6.5 42.5,0.5 43.5,0.5
N$1
  Top 0.7: R9.2 114.92,17.5
  Top 1: 114.92,17.5 R10.1
  pour Top (no thermals): 117,18.5 112.5,18.5 112.5,16.5 117,16.5
N$2  (via drill 0.45)
  Top 0.3: 41.87,11.87 v41.5,11.5 | v14.5,22.5 15,23 15,28.64 IC2.2
  Top 0.406: IC1.7 41.87,11.87
  Bottom 0.3: v14.5,22.5 13.75,23.25 12.84,23.25 12.84,22.28 21.53,13.59 29.91,13.59 34.38,9.12 39.12,9.12 v41.5,11.5
N$3  (via drill 0.45)
  Top 0.35: C20.1 74.62,7.88 72.88,9.62 C21.1
  Top 0.4: 75.55,7.8 C20.1 | R16.2 101.45,16 100,16 99,15 v96.5,15
  Top 0.7: 75.55,7.8 IC6.2 75.55,6.55 75.62,6.62 v75.88,6.38 | R14.2 R16.2
  Bottom 0.35: 80.61,6.14 80.38,6.38 v75.88,6.38 | v96.5,15 96.5,12 89.5,5 82.28,5 81.12,6.14 J1.1
  Bottom 0.4: J1.1 80.61,6.14
N$4
  Top 0.6: D8.1 D9.2
N$5  (via drill 0.45)
  Top 0.3: IC1.6 42.13,13.13 v41.5,12.5 | v13.5,22.5 13.5,25.8 IC2.4
  Bottom 0.3: v13.5,22.5 21.88,14.12 30.12,14.12 34.5,9.75 38.75,9.75 v41.5,12.5
N$6
  Top 0.305: R2.1 16.5,29.91
  Top 0.406: IC2.8 16.5,29.91 IC2.1
N$7  (via drill 0.45)
  Top 0.813: R4.1 R3.1 20.55,48.5 | 20.55,48.5 v20,48.5 | v21,48.5 20.55,48.5 | v20,28.62 19.21,28.62 IC2.7
  Bottom 0.813: v20,48.5 v20,28.62
  pour Bottom: 21,49 19.88,49 19.88,28.38 20.62,28.38 20.62,48 21,48
N$8
  Top 0.61: IC2.5 21.5,26.09 | 21.5,26.09 R6.1 | R5.1 23,26.09 21.5,26.09
N$9
  Bottom 0.8: T1.11 83.5,32.5 86,35 SJ1.1
N$10
  Top 0.4: IC3.1 29.95,8.41 31.4,8.41 31.4,2.12 R20.1 R21.2
N$11
  Top 0.6: D9.1 55,2.8 C33.2 55,3.5 58,0.5 61,0.5 62.1,1.61 PS2.3
N$12
  Top 0.406: R36.1 109,2.5 107.5,4 LED1.A
  Top 1.016: R36.1 110.58,2.34
N$13
  Top 0.406: IC1.2 52.02,11.87 R12.1
N$14
  Top 0.406: R19.1 R36.2
N$15
  Top 1: R10.2 R14.1
  pour Top (no thermals): 110.5,18.5 107.5,18.5 107.5,16.5 110.5,16.5
N$16
  Top 0.4: R16.1 99.46,17.11 98.76,16.55 R18.2
N$17
  Top 0.406: R22.1 R19.2 120.5,2.5
N$18  (via drill 0.45)
  Top 0.35: Q5.2 69.7,17.64 R15.1 | v71,14 71,15 68.36,17.64
  Top 0.4: 77.45,7.8 C20.2 | 68.36,17.64 Q5.2
  Top 0.7: IC6.1 77.45,7.8 | v78.5,8 78.38,7.88 C20.2
  Bottom 0.4: v78.5,8 74.5,8 71,11.5 v71,14
N$19
  Top 0.35: Q5.1 69.2,13.11 69.2,10.3 72.15,7.35 R17.2
N$20
  pour Top (no thermals): 19,44.5 8.5,44.5 8.5,39.5 19,39.5
N$21
  Top 0.5: R15.2 C21.2
N$22
  Top 0.406: 13.75V.C R24.2
N$24
  Top 0.406: R34.1 126.43,2.58
  Top 1.016: 126.43,2.58 R22.2
N$25
  Bottom 0.8: SJ1.3 85.96,42.5 T1.13
N$26
  Top 0.8: R32.2 91.5,3.27 91.4,3.25 91.4,1.55 REG5V.C
N$27
  Top 1: R23.1 R31.1 75.88,15.82 D6.1
N$28
  Top 0.406: R35.1 R34.2
N$29
  Top 1.5: R33.2 C36.1
OPTO-EMITT  (via drill 0.45)
  Top 0.7: IC1.1 49.91,10.59 50.5,10 v50.5,9.5 R1.2 | Q5.4 57.8,9 57.5,9 v57,8.5
  Bottom 0.406: v57,8.5 51.5,8.5 v50.5,9.5
PRE  (via drill 0.45)
  Top 0.4: R25.2 v8,1.5 | v19.5,3 19.32,3.17 L1.2
  Top 0.406: R25.2 7.9,2.4 C30.1
  Bottom 0.4: v8,1.5 8.5,1 18.5,1 19.5,2 v19.5,3
  pour Top (no thermals): 21.5,3 30.11,3 30.75,3.63 30.75,6.87 30.11,7.5 24.5,7.5 23.5,8.5 19.14,8.5 18.5,7.87 18.5,3 19,2.5 21,2.5
PWRGND  (via drill 0.45)
  Top 0.406: LED1.C 102.45,7.55 v102,8
  Top 0.55: C11.1 72.62,2.12 74.38,2.12 v74.5,2.25 74.5,2.12 75.67,2.12 IC6.3 77.5,1.95 81.5,1.95 81.5,2.73 J1.2 | 72.38,2.12 67.36,2.12
  Top 0.6: IC4.2 84.62,11.62 v85,12 | PS2.7 67.36,2.12 | 72.38,2.12 C11.1
  Top 0.7: v85,11 v85,12 v85,13
  Top 0.8: C15.2 146.5,12.5 140.5,6.5
  Top 3: T1.2.4 79.42,49.92 T1.15 | PWRGND_TP.TP 140.5,6.5
  other vias: 84,15.5 83,17 84,17 82,17 84.5,7 93,10.12 92,10.12 93.5,4 93.5,7.5 95.5,7 102,7 95.5,4 102,9.12 83,6.5 85,2 84,6.5 83,15.5 82,15.5 83.5,7 93.5,23.12 94.5,23.12 95.5,23.12 95,24.12 94,24.12 94,22.12 95,22.12 90.5,22.12 90.5,23.12 90.5,24.12 98.5,24.12 98.5,23.12 98.5,22.12 95.5,21.12 93.5,21.12 94.5,21.12 91.5,20.62 92.5,20.62 96.5,20.62 97.5,20.62 93.5,55.62 94.5,55.62 95.5,55.62 95,56.62 94,56.62 94,54.62 95,54.62 90.5,54.62 90.5,55.62 90.5,56.62 98.5,56.62 98.5,55.62 98.5,54.62 91.5,58.12 92.5,58.12 96.5,58.12 97.5,58.12 93.5,57.62 95.5,57.62 90.5,57.62 98.5,57.62 94,58.62 90,58.62 86.5,59.12 89,58.62 95,58.62 98.5,58.62 94.5,57.62 86.5,58.12 88,54.12 87,53.12 86,52.12 86.5,57.12 86.5,56.12 85.5,54.62 79,51.12 75,48.12 75,51.12 79,48.12 84,50.12 85,51.12 85.5,61.12 85.5,62.62 85.5,64.12 85.5,66.12 85.5,68.12 85.5,70.12 87,70.12 144.5,61.62 146.5,61.62 148.5,61.62 164,61.62 166,61.62 168,61.62 161,34 165,38 161,38 162,34 162,38 163,38 164,38 164,34 163,34 83.5,2.5 144.5,17.5 146.5,17.5 148.5,17.5 164,17.5 166,17.5 168,17.5 137.5,10 137.5,8.5 137.5,7 90.5,20.62 98.5,20.62 84,2 84.5,2.5 91,9.62 92.5,6.62
  pour Bottom (isolate 2.5, rank 6, no thermals): 185,75.5 67,75.5 67,5 76.5,-4.5 182,-4.5 186,-0.5 186,74.5
  pour Top (isolate 0.406, rank 5, no thermals): 86,7.5 82,7.5 82,7 81.5,6.5 80,6.5 79.5,6 79.5,1 87,1 87,6.5
  pour Top (no thermals): 95.5,10.5 91,10.5 90.62,10.12 90.62,5.38 92.5,3.5 97.5,3.5 98,4 98,5.5 97.5,6 97,6 95.5,7.5
  pour Top (no thermals): 99,59 89.75,59 84.75,54 81.5,54 78.75,51.25 74.75,51.25 74.75,48.25 75,48 82,48 88.5,54.5 99,54.5
  pour Top (no thermals): 98,20 98.86,20 98.86,25 90.14,25 90.14,20 93,20 94.5,18.5 98,18.5
  pour Bottom (isolate 0.254, no thermals): 105,17.5 67,17.5 67,1 106.5,1 106.5,16
  pour Top (isolate 2.5, no thermals): 168.5,38 158,38 153,33 153,30.5 156.5,30.5 162,36 168.5,36
  pour Top (isolate 2.51, rank 3, no thermals): 167.5,19 137.5,19 137.5,2 180.5,2 180.5,81 87.5,81 85,78.5 85,55.5 86,54.5 99,54.5 99,59 100.5,60.5 167.5,60.5 170.5,57.5 170.5,40 168.5,38 158.5,38 158.5,28 170.5,28 170.5,22
  pour Top (isolate 2.5, no thermals): 170,38.38 158,38.38 158,36 170,36
  pour Bottom (no thermals): 169.5,38.5 158,38.5 158,35.5 169.5,35.5
  pour Top (no thermals): 81.5,14 83,14 85,16 85,17.5 81.5,17.5
  pour Top (no thermals): 102.5,9.5 100,9.5 100,6.5 102.5,6.5
Q1G
  Top 0.61: Q1.1 25.5,48.91
  Top 0.813: R3.2 R4.2
  pour Top (no thermals): 28.5,52.5 22,52.5 22,48.5 28.5,48.5
Q2G  (via drill 0.45)
  Top 0.61: v23,30 R5.2 R6.2 v21.5,30
  Top 1.016: Q2.1 26.68,37.32 GATE2_TP.TP
  Bottom 1.016: v21.5,30 v23,30 23,32.5 26.5,36 GATE2_TP.TP
  pour Top (no thermals): 23.5,30.5 21,30.5 21,28 23.5,28
  pour Bottom (no thermals): 26.5,38.5 21.25,33.25 21.25,30 21.25,29.75 23.75,29.75 24,30 24,32.5 28,36.5 28,38 28,38.5
RECT  (via drill 0.45)
  other vias: 110,25 110,23.5 108.5,23.5 108.5,25 105.5,29.5 105.5,26.5 105.5,28 107,26.5 108.5,26.5 108.5,28 108.5,29.5 107,28 107,29.5 110,29.5 110,26.5 110,28 111.5,26.5 111.5,28 111.5,29.5 105.5,23.5 105.5,25 103.5,28 103.5,26.5 103.5,25 104.5,30.5 106,30.5 107.5,30.5 109,30.5 110.5,30.5 112,30.5 113.5,30.5 113,29.5 114.5,29.5 114.5,28 114.5,26.5 114.5,25 114.5,23.5 114.5,22 113,22 111.5,22 110,22 108.5,22 107,22 105.5,22 104,22 113,28 113,25 111.5,25 111.5,23.5 113,23.5 107,23.5 107,25 103.5,23.5 103.5,29.5 113,26.5 108,54 108,55.5 109.5,55.5 109.5,54 112.5,49.5 112.5,52.5 112.5,51 111,52.5 109.5,52.5 109.5,51 109.5,49.5 111,51 111,49.5 108,49.5 108,52.5 108,51 106.5,52.5 106.5,51 106.5,49.5 112.5,55.5 112.5,54 114.5,51 114.5,52.5 114.5,54 113.5,48.5 112,48.5 110.5,48.5 109,48.5 107.5,48.5 106,48.5 104.5,48.5 105,49.5 103.5,49.5 103.5,51 103.5,52.5 103.5,54 103.5,55.5 103.5,57 105,57 106.5,57 108,57 109.5,57 111,57 112.5,57 114,57 105,51 105,54 106.5,54 106.5,55.5 105,55.5 111,55.5 111,54 114.5,55.5 114.5,49.5 105,52.5 122.5,40.5 122.5,38.5 118.5,40.5 118.5,38.5 119.5,41.5 121.5,41.5 121.5,37.5 119.5,37.5
  pour Bottom (isolate 1.27, no thermals): 125,57.25 103.38,57.25 103.38,48.5 115,48.5 118,45.5 118,33.5 114,29.5 114,21.75 125,21.75
  pour Bottom (isolate 1.27, no thermals): 103.38,21.75 114.62,21.75 114.62,30.5 103.38,30.5
  pour Top (isolate 2.5, no thermals): 105.5,30.5 115,30.5 118,33.5 118,45.5 115,48.5 103.5,48.5 103.5,56.5 104.25,57.25 125,57.25 125,21.75 107.75,21.75 105.5,24
REG  (via drill 0.45)
  Top 0.3: IC3.4 34.5,8.75 v36.5,10.75 | C32.2 17.5,24 v17,23.5
  Top 0.4: R20.2 37.2,1.75 13.75V.A 37.45,5.8 IC3.4
  Top 0.6: D8.2 45.3,4.8 13.75V_TP.TP
  Top 1: v17,23.5 16.5,23 v16,23.5 | v16,23.5 v16,22.5 | v16,23.5 16.62,22.88
  Top 1.2: 16.62,22.88 C13.1
  Bottom 1: v36.5,10.75 v35.25,10.75
  Bottom 1.2: v37.75,10.75 v36.5,10.75 35.1,10.75 30.8,15.05 22.45,15.05 16,21.5 v16,23.5 17,22.5 v17,23.5
  pour Top (rank 6, no thermals): 20,28 17,28 17,24 16.88,23.88 16,23.88 15.75,23.62 15.75,22.5 19.5,22.5 19.5,25.5 18.5,25.5 18.5,26.5 20,26.5
  pour Top (rank 3, no thermals): 45.87,11 31.5,11 31.5,4 42,4 42,8.5 44.5,8.5 44.5,3.5 53.5,3.5 53.5,11 52,11 51.5,10.5 51.5,8 51,7.5 47,7.5 46.5,8 46.5,10.37
  pour Bottom: 16.75,23.75 16,23.75 16,21.5 17.12,21.5 17.25,21.62 17.25,23.25
REG5V  (via drill 0.45)
  Top 0.406: R17.1 C11.2 R17.1 | 72.5,6 R17.1
  Top 0.5: C11.2 73.5,5 v74,5
  Top 0.55: AUX5V_TP.TP 100.38,2 C34.2
  Top 0.6: REG5V.A 93.62,1.58 v93.62,2.75 97.75,2.75 98.95,3.95 PS1.2 99.28,5.12 C34.2 | R17.1 70.85,5.65 67.19,9.32 PS2.8
  Bottom 0.55: v93.62,2.75 91.38,0.5 73.5,0.5 72.5,1.5 72.5,3.5 v74,5
RT
  Top 0.406: IC1.4 50.41,14.4 52,16 53.65,16 R13.1
SWITCH1
  pour Top (rank 3, no thermals): 17,0.5 17.31,0.81 17.5,1.26 17.5,8.87 16.86,9.5 10.38,9.5 10.38,6.5 13.5,6.5 14,6 14,4.5 12.75,3.25 11.25,3.25 11.25,1.75 12.5,0.5
SWITCH2
  pour Top (isolate 0.305, rank 2, no thermals): 86,12.5 86.5,12.5 87,13 88.5,13 89.5,14 94,14 94,17.5 86,17.5
TRANS1  (via drill 0.45)
  Bottom 0.4: SJ1.2 85.5,39.5 77.16,39.5 T1.2.8
  Bottom 1: SJ1.2 87.5,40 89,41.5 v89.5,41.5
  other vias: 95.5,44.5 95.5,43 94,43 94,44.5 91,49 91,46 91,47.5 92.5,46 94,46 94,47.5 94,49 92.5,47.5 92.5,49 95.5,49 95.5,46 95.5,47.5 97,46 97,47.5 97,49 91,43 91,44.5 89,47.5 89,46 89,44.5 90,50 91.5,50 93,50 94.5,50 96,50 97.5,50 99,50 98.5,49 100,49 100,47.5 100,46 100,44.5 100,43 100,41.5 98.5,41.5 97,41.5 95.5,41.5 94,41.5 92.5,41.5 91,41.5 98.5,47.5 98.5,44.5 97,44.5 97,43 98.5,43 92.5,43 92.5,44.5 89,43 89,49 98.5,46 106.5,43.5 106.5,42.5 106.5,41.5 111.5,41.5 111.5,42.5 111.5,43.5 113.5,43.5 113.5,42.5 113.5,41.5 103.5,44 110,44 103.5,41.5 108,44 108,41.5 109,41.5 110,41.5 109,44 104.5,44 104.5,41.5
  pour Top (isolate 2.5, no thermals): 114,44 102.88,44 100.5,46.38 100.5,50.5 89,50.5 88.5,50 88.5,41 114,41
  pour Bottom (isolate 2.5, no thermals): 100.5,50.5 89,50.5 88.5,50 88.5,41.12 113.88,41.12 113.88,43.88 102.89,43.88 100.5,46.27
TRANS2  (via drill 0.45)
  Top 3: T1.2.14 78.92,22.5 T1.9
  other vias: 93.5,34.5 93.5,36 95,36 95,34.5 98,30 98,33 98,31.5 96.5,33 95,33 95,31.5 95,30 96.5,31.5 96.5,30 93.5,30 93.5,33 93.5,31.5 92,33 92,31.5 92,30 98,36 98,34.5 100,31.5 100,33 100,34.5 99,29 97.5,29 96,29 94.5,29 93,29 91.5,29 90,29 90.5,30 89,30 89,31.5 89,33 89,34.5 89,36 89,37.5 90.5,37.5 92,37.5 93.5,37.5 95,37.5 96.5,37.5 98,37.5 99.5,37.5 90.5,31.5 90.5,34.5 92,34.5 92,36 90.5,36 96.5,36 96.5,34.5 100,36 100,30 90.5,33 106.5,37.5 106.5,36.5 106.5,35.5 111.5,37.5 111.5,36.5 111.5,35.5 108,37.5 109,37.5 110,37.5 110,34.5 109,34.5 108,34.5 113.5,35.5 113.5,36.5 113.5,37.5 104.5,34.5 104.5,37.5 103.5,37.5 103.5,34.5
  pour Top (isolate 2.5, no thermals): 114,38 87,38 87,29 82.5,24.5 79.5,24.5 77.5,26.5 76.5,26.5 75.5,25.5 75.5,23.5 78,21 83,21 90,28 100.5,28 100.5,31.5 103.5,34.5 114,34.5
  pour Bottom (isolate 2.5, no thermals): 114,38 88.5,38 88.5,28 100.5,28 100.5,31.49 103.51,34.5 114,34.5

## Text on the board
tNames: V+ IN | HV OUT | GND | GND